# Altium PCB V_6.PcbDoc
Units mm, origin at the board's own origin, x right, y up, seen from the top; angles counter-clockwise.
Board outline 152.4 x 101.6 mm, 2 copper layers (Top Layer, Bottom Layer); 6 components, 12 nets, 99 pads, 1 vias.
Unrouted connection lines stored in the file: 1.
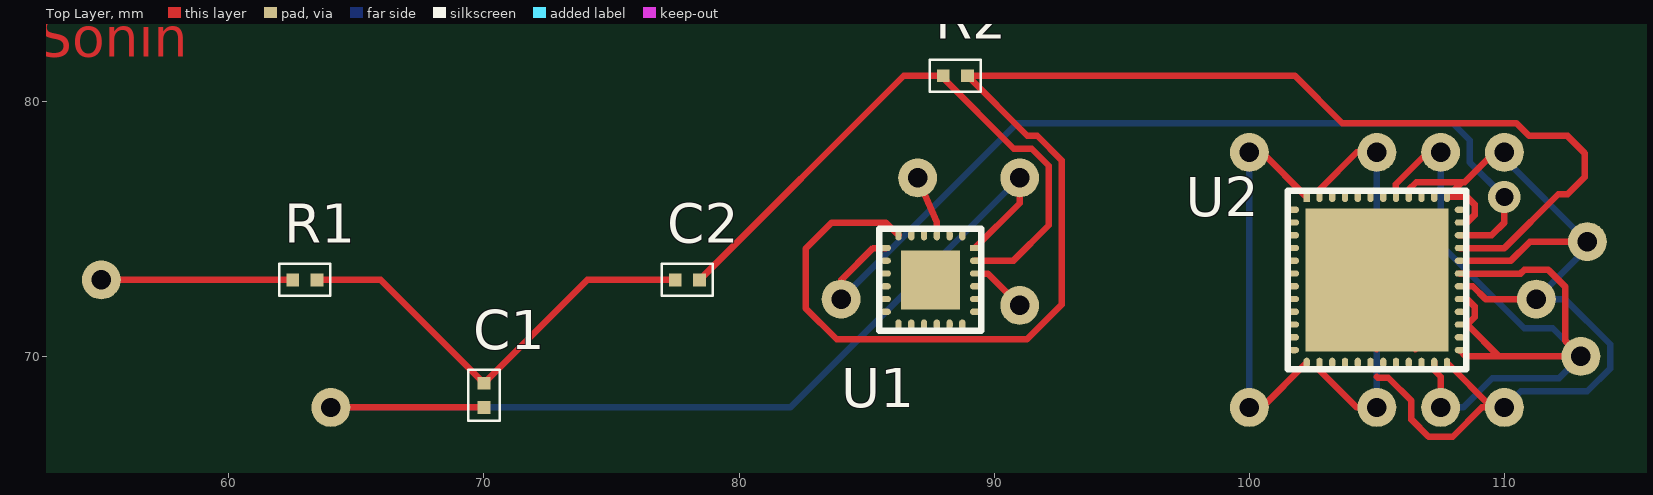
[diagram p0: Top Layer view]
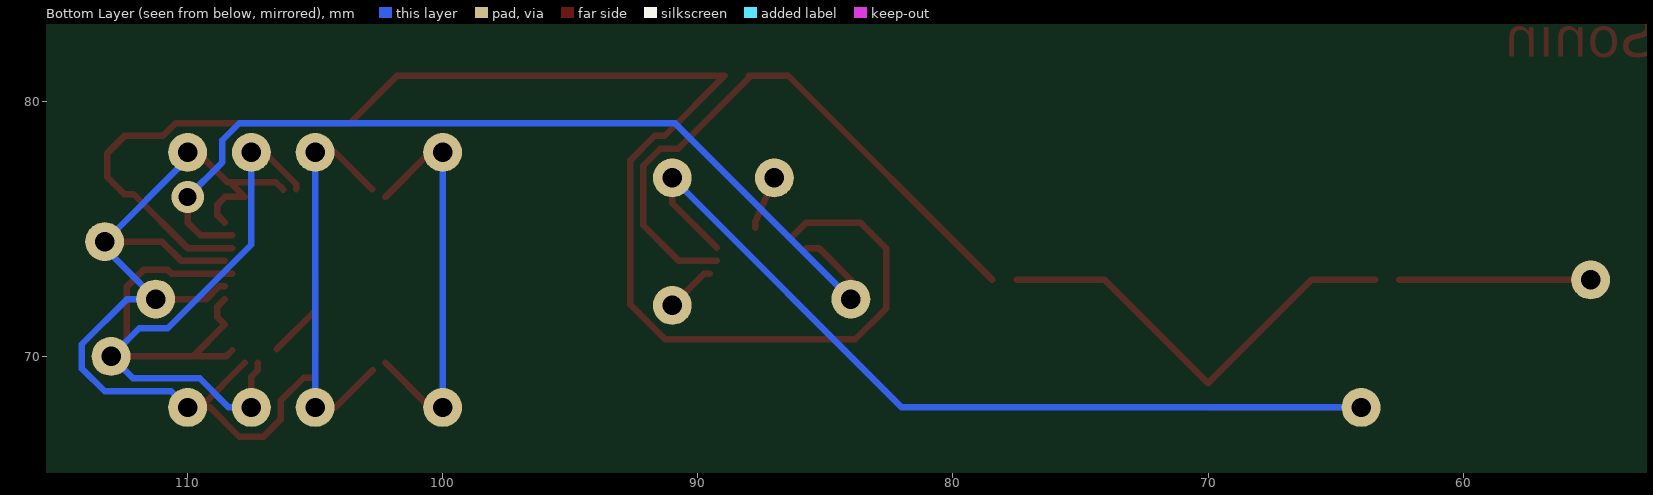
[diagram p1: Bottom Layer view, seen from below]

## Layer stack, top to bottom
Top Layer: signal copper 0.0356
Dielectric: dielectric 0.32, FR-4, Dk 4.8
Bottom Layer: signal copper 0.0356

## Board outline
25.4,25.4 177.8,25.4 177.8,127 25.4,127

## Design rules (kind name [scope] priority, off if disabled: settings)
Clearance [All] p1: gap=0.254
PolygonConnect [All] p1: connectstyle=Relief reliefconductorwidth=0.254 reliefentries=4 polygonreliefangle="90 Angle"
RoutingVias [All] p1: holewidth=0.711 width=1.27 viastyle="Through Hole" minholewidth=0.711 minwidth=1.27 maxholewidth=0.711 maxwidth=1.27
SilkscreenOverComponentPads [All] p1: minsilkscreentomaskgap=0.254
SolderMaskExpansion [All] p1: expansion=0.102
Width [All] p1: maxlimit=0.254 minlimit=0.254 preferedwidth=0.254
27 further rules are at their usual default settings.

## Classes and differential pairs
component class V_6: C1 C2 R2 U1 U2

## Components (designator, comment, footprint, x,y, rotation, side; value= is the part's Value field where it differs from the comment)
C1 "2 pF" C_0805 70,68 r90 top
C2 "2 pF" C_0805 77.5,73 r0 top
R1 "8.2k" R_0805 62.5,73 r0 top
R2 "2.4k" R_0805 88,81 r0 top
U1 "" ADA4932-2 87.5,73 r0 top
U2 "" ads61b49 105,73 r0 top

## Footprints (in the part's own frame and the unit in brackets; to place one, negate y for a bottom-side part, rotate by r counter-clockwise, add the part's x,y. Pads: shape width x height; smd on the part's side, far side on the other; paste and mask are expansions set on the pad)
ADA4932-2 [mm]
  rect 0.4x0.25 smd: 1(1.75,1.25)
  oval 0.4x0.25 smd: 2(1.75,0.75) 3(1.75,0.25) 4(1.75,-0.25) 5(1.75,-0.75) 6(1.75,-1.25) 13(-1.75,-1.25) 14(-1.75,-0.75) 15(-1.75,-0.25) 16(-1.75,0.25) 17(-1.75,0.75) 18(-1.75,1.25)
  oval 0.25x0.4 smd: 7(1.25,-1.75) 8(0.75,-1.75) 9(0.25,-1.75) 10(-0.25,-1.75) 11(-0.75,-1.75) 12(-1.25,-1.75) 19(-1.25,1.75) 20(-0.75,1.75) 21(-0.25,1.75) 22(0.25,1.75) 23(0.75,1.75) 24(1.25,1.75)
  rect 2.3x2.3 smd: 25(0,0)
  silkscreen extent -2,-2 2,2
ads61b49 [mm]
  rect 0.25x0.4 smd: 1(-2.75,3.25)
  oval 0.25x0.4 smd: 2(-2.25,3.25) 3(-1.75,3.25) 4(-1.25,3.25) 5(-0.75,3.25) 6(-0.25,3.25) 7(0.25,3.25) 8(0.75,3.25) 9(1.25,3.25) 10(1.75,3.25) 11(2.25,3.25) 12(2.75,3.25) 25(2.75,-3.25) 26(2.25,-3.25) 27(1.75,-3.25) 28(1.25,-3.25) 29(0.75,-3.25) 30(0.25,-3.25) 31(-0.25,-3.25) 32(-0.75,-3.25) 33(-1.25,-3.25) 34(-1.75,-3.25) 35(-2.25,-3.25) 36(-2.75,-3.25)
  oval 0.4x0.25 smd: 13(3.25,2.75) 14(3.25,2.25) 15(3.25,1.75) 16(3.25,1.25) 17(3.25,0.75) 18(3.25,0.25) 19(3.25,-0.25) 20(3.25,-0.75) 21(3.25,-1.25) 22(3.25,-1.75) 23(3.25,-2.25) 24(3.25,-2.75) 37(-3.25,-2.75) 38(-3.25,-2.25) 39(-3.25,-1.75) 40(-3.25,-1.25) 41(-3.25,-0.75) 42(-3.25,-0.25) 43(-3.25,0.25) 44(-3.25,0.75) 45(-3.25,1.25) 46(-3.25,1.75) 47(-3.25,2.25) 48(-3.25,2.75)
  rect 5.6x5.6 smd: 49(0,0)
  silkscreen extent -3.5,-3.5 3.5,3.5
C_0805 [mm]
  rect 0.5x0.5 smd: 1(0,0) 2(0.95,0)
  silkscreen extent -0.53,-0.63 1.48,0.63
R_0805 [mm]
  rect 0.5x0.5 smd: 1(0,0) 2(0.95,0)
  silkscreen extent -0.53,-0.63 1.48,0.63

## Part data
C1 C2: library part C
R1 R2: library part R
U1: library part ADA4932-2
U2: library part ADS61B49

## Free pads (board coordinates)
  round 1.524 hole 0.762: 0(84,72.25) GND(64,68) ""(55,73) ""(87,77) ""(91,72) ""(91,77) ""(100,68) ""(100,78) ""(105,68) ""(105,78) ""(107.5,68) ""(107.5,78) ""(110,68) ""(110,78) ""(111.25,72.25) ""(113,70) ""(113.25,74.5)

## Via types
v1: diameter 1.27, hole 0.711, Top Layer to Bottom Layer, 1 vias

## Nets (pads, with @x,y where several pads share a name; then routed paths per layer and width w, separated by ;. In a path a pad name is that pad's centre, name@x,y a point inside that pad or via, vN(x,y) a via of type N, cw(c..) or ccw(c..) an arc to the next point about the centre after c; other vN are vias at no path point)
1.8V: pad.@105,68 pad.@105,78 U2.2 U2.35 | length 15.7
  Top Layer w0.254: 102.75,69.459 104.209,68 pad.@105,68 ; 102.756,76.547 104.209,78 pad.@105,78
  Bottom Layer w0.254: pad.@105,68 pad.@105,78
3.3V: pad.@107.5,68 pad.@107.5,78 pad.@113,70 U2.8 U2.18 U2.20 U2.22 U2.24 U2.26 | length 36.9
  Top Layer w0.254: 105.742,76.549 105.742,76.751 106.991,78 pad.@107.5,78 ; U2.26 107.25,69.459 107.5,69.209 pad.@107.5,68 ; U2.24@108.25,70.244 108.494,70 109.791,70 ; U2.18 110.634,73.25 110.777,73.393 111.723,73.393 112.393,72.723 112.393,70.607 113,70 109.791,70 ; 108.549,72.242 108.831,71.96 108.831,71.54 108.541,71.25 109.791,70
  Bottom Layer w0.254: pad.@107.5,68 108.384,68 109.527,69.143 112.143,69.143 113,70 111.893,71.107 110.777,71.107 107.5,74.384 pad.@107.5,78
5V: pad.@91,72 U1.3 | length 2
  Top Layer w0.254: 89.541,73.25 89.75,73.25 pad.@91,72
-5V: pad.@87,77 U1.22 | length 2.1
  Top Layer w0.254: pad.@87,77 87.75,75.25 87.75,75.041
AGND: pad.@110,68 pad.@110,78 pad.@111.25,72.25 pad.@113.25,74.5 U2.9 U2.12 U2.14 U2.17 U2.19 U2.25 U2.49 | length 46.6
  Top Layer w0.254: 105,69.209 105.04,69.169 105.447,69.169 106.357,68.259 106.357,67.527 107.027,66.857 107.973,66.857 109.116,68 pad.@109.508,68 ; U2.49@105,70.291 U2.49@105,71.791 ; U2.49 U2.49@105,71.791 ; 106.25,76.541 106.54,76.831 108.337,76.831 ; U2.49@106.5,70.291 U2.49@105,71.791 ; U2.25@107.758,69.75 pad.@109.508,68 ; 108.541,72.75 108.759,72.75 109.259,72.25 pad.@111.25,72.25 ; 108.541,75.25 108.831,75.54 108.831,75.96 108.535,76.256 107.864,76.256 107.858,76.25 107.756,76.25 108.337,76.831 ; 108.549,73.742 110.242,73.742 111,74.5 pad.@113.25,74.5 ; pad.@110,68 pad.@109.508,68 ; pad.@110,78 109.608,78 108.439,76.831 108.337,76.831
  Bottom Layer w0.254: pad.@110,68 110.635,68.635 113.251,68.635 114.143,69.527 114.143,70.473 112.366,72.25 111.25,72.25 113.25,74.25 113.25,74.5 110,77.75 pad.@110,78
DGND: pad.@100,68 pad.@100,78 U2.1 U2.36 | length 15.9
  Top Layer w0.254: pad.@100,68 100.494,68 U2.36@102.244,69.75 ; pad.@100,78 100.494,78 U2.1@102.244,76.25
  Bottom Layer w0.254: pad.@100,68 pad.@100,78
GND: C1.1 pad.@91,77 pad.GND U1.1 | length 40.2
  Top Layer w0.254: pad.GND C1.1 ; U1.1@89.25,74.256 91,76.006 pad.@91,77
  Bottom Layer w0.254: pad.GND 82,68 pad.@91,77
NetC1_2: C1.2 C2.1 R1.2 | length 17.4
  Top Layer w0.254: R1.2 65.95,73 C1.2 74.05,73 C2.1
NetC2_2: C2.2 R2.1 U1.2 | length 24.3
  Top Layer w0.254: C2.2 86.45,81 R2.1 88,80.911 90.768,78.143 91.473,78.143 92.143,77.473 92.143,75.143 90.758,73.758 89.622,73.758 ; U1.2 89.614,73.75
NetR1_1: pad.@55,73 R1.1 | length 7.5
  Top Layer w0.254: pad.@55,73 R1.1
NetR2_2: R2.2 U1.19 U2.16 | length 60.9
  Top Layer w0.254: U1.19 85.75,75.25 83.634,75.25 82.607,74.223 82.607,71.893 83.831,70.669 91.285,70.669 92.651,72.035 92.651,77.684 91.684,78.651 91.299,78.651 R2.2 101.791,81 103.648,79.143 110.473,79.143 110.973,78.643 112.473,78.643 113.143,77.973 113.143,77.027 112.473,76.357 112.107,76.357 110,74.25 U2.16
NetU1_+OUT: pad.0 U1.18 U2.15 | length 36.5
  Top Layer w0.254: pad.0 84,73 85.25,74.25 U1.18 ; U2.15 108.258,74.758 109.508,74.758 110,75.25 v1(110,76.25)
  Bottom Layer w0.254: pad.0 90.893,79.143 107.973,79.143 108.643,78.473 108.643,77.607 v1(110,76.25)
pads on no net: U1.4 U1.5 U1.6 U1.7 U1.8 U1.9 U1.10 U1.11 U1.12 U1.13 U1.14 U1.15 U1.16 U1.17 U1.20 U1.21 U1.23 U1.24 U1.25 U2.3 U2.4 U2.5 U2.6 U2.7 U2.10 U2.11 U2.13 U2.21 U2.23 U2.27 U2.28 U2.29 U2.30 U2.31 U2.32 U2.33 U2.34 U2.37 U2.38 U2.39 U2.40 U2.41 U2.42 U2.43 U2.44 U2.45 U2.46 U2.47 U2.48

## Other copper
Top Layer:
  text "Sonin" at 52.5,81.75 h1.52

## Silkscreen, mask and mechanical layers (free items; w line width, h text height)
Bottom Solder:
  lines w0.254: 50,65 50,85 120,85 120,65 50,65